# Altium PCB PowerTree.PcbDoc
Units mil, origin at the board's own origin, x right, y up, seen from the top; angles counter-clockwise.
Board outline 7270 x 2880 mil, 2 copper layers (Top Layer, Bottom Layer); 214 components, 114 nets, 516 pads, 130 vias.
Unrouted connection lines stored in the file: 3.
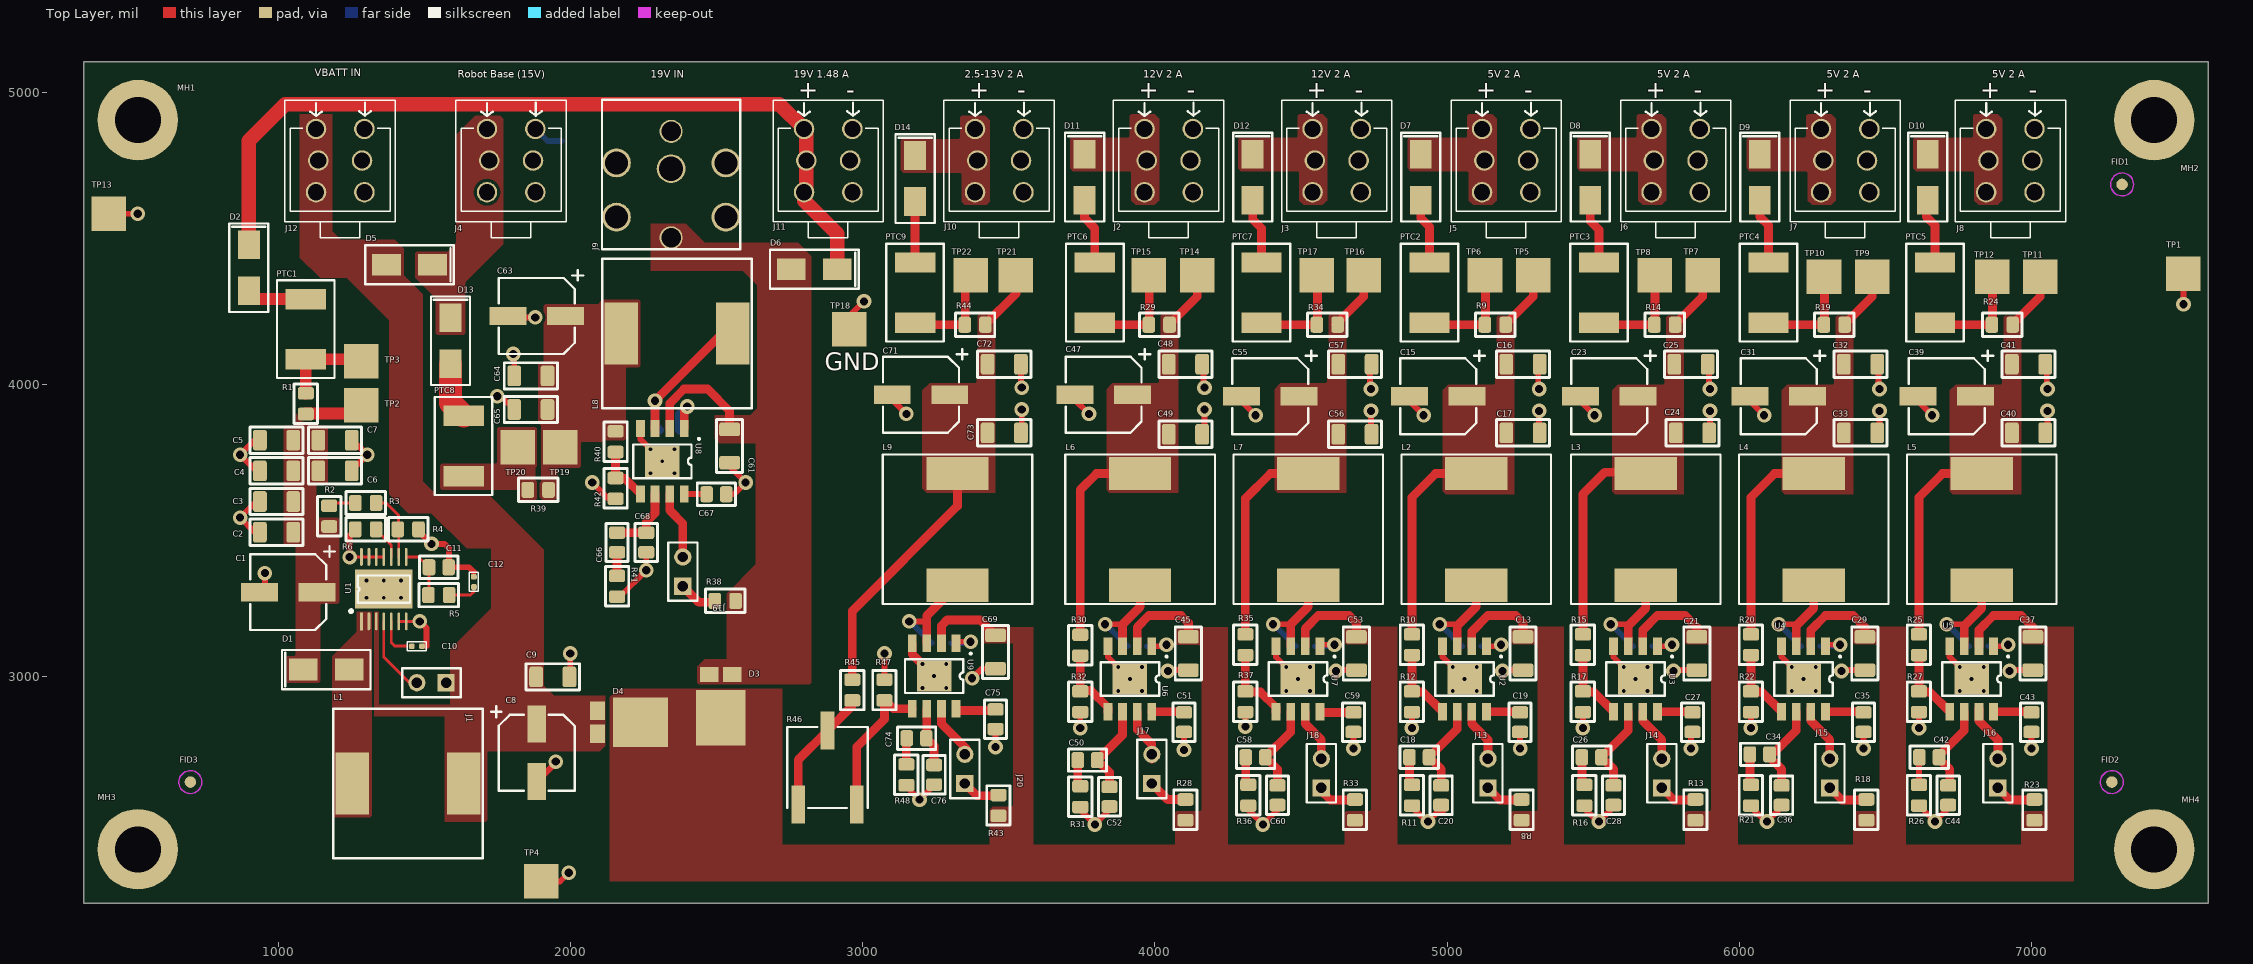
[diagram p0: Top Layer view]
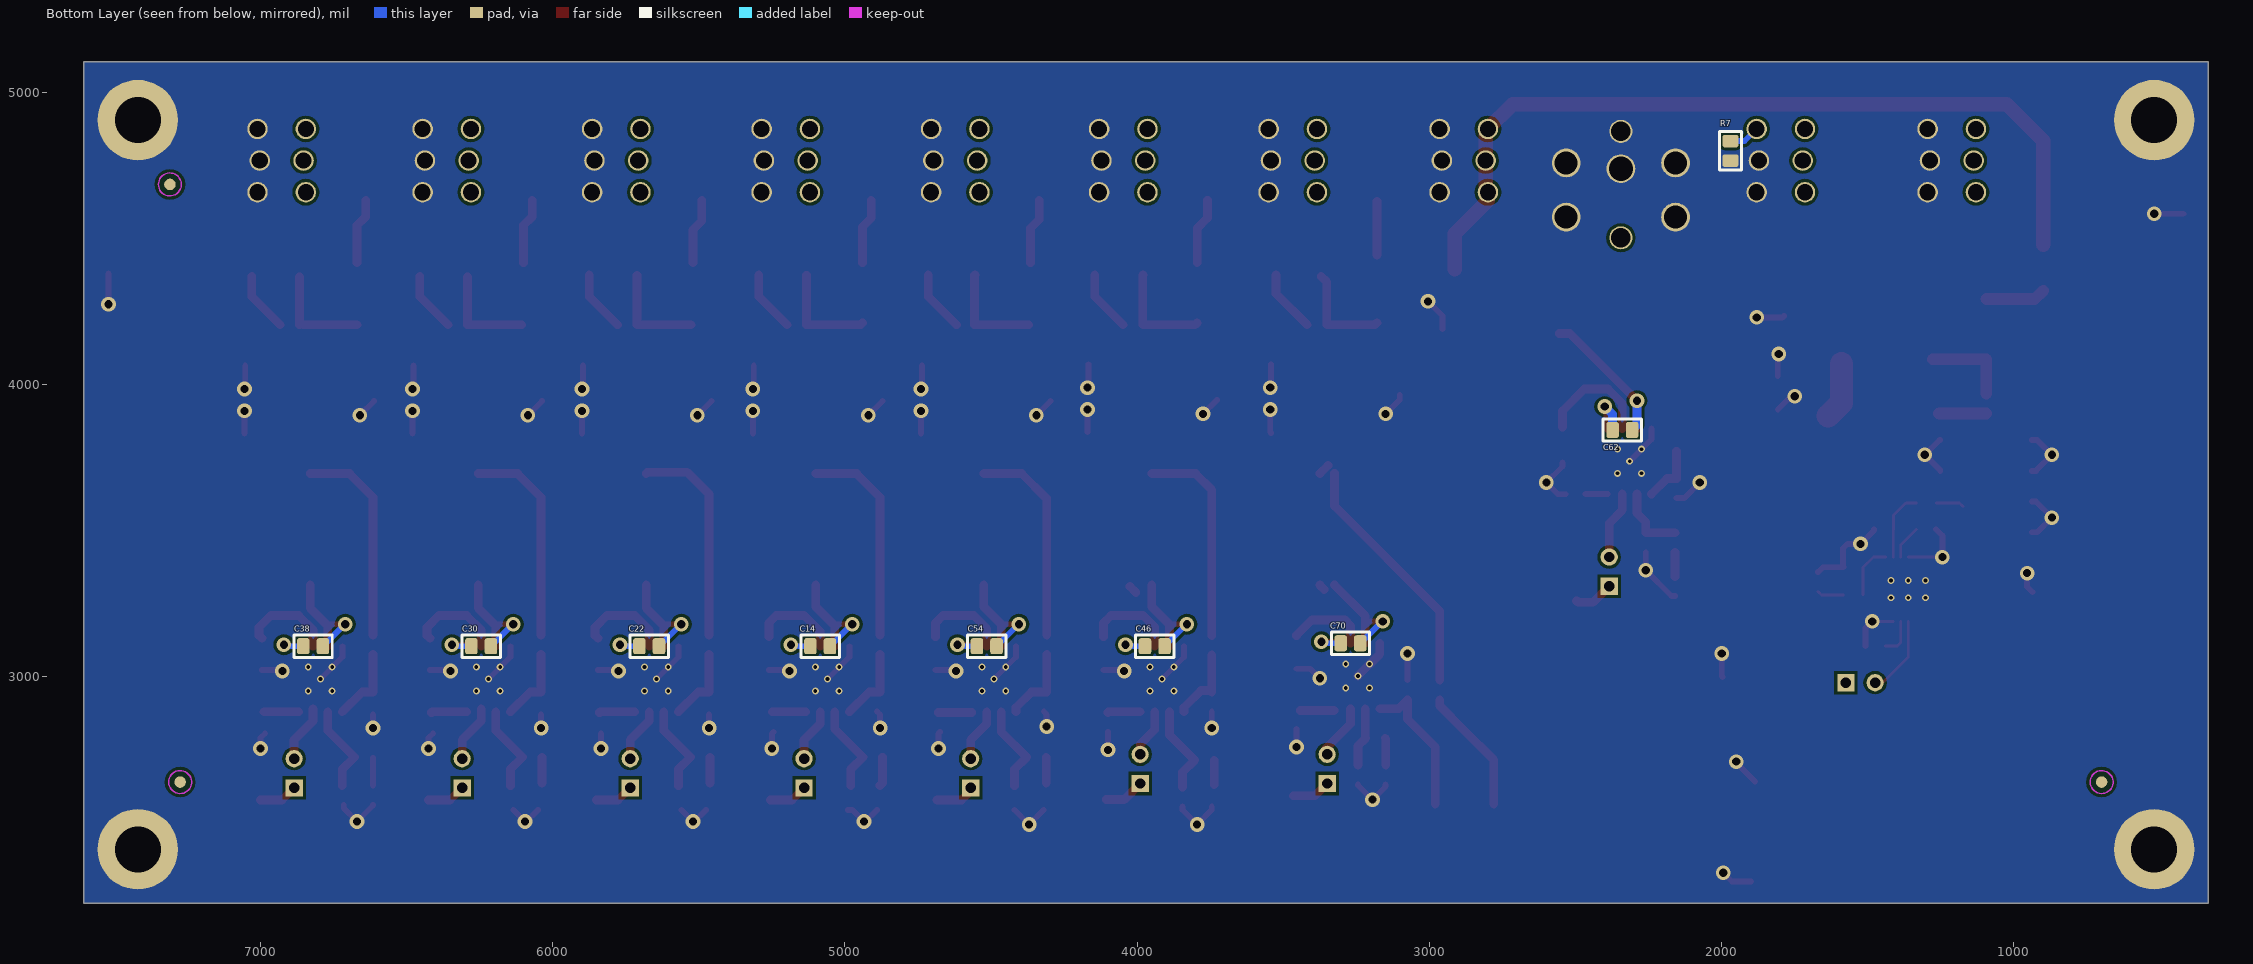
[diagram p1: Bottom Layer view, seen from below]
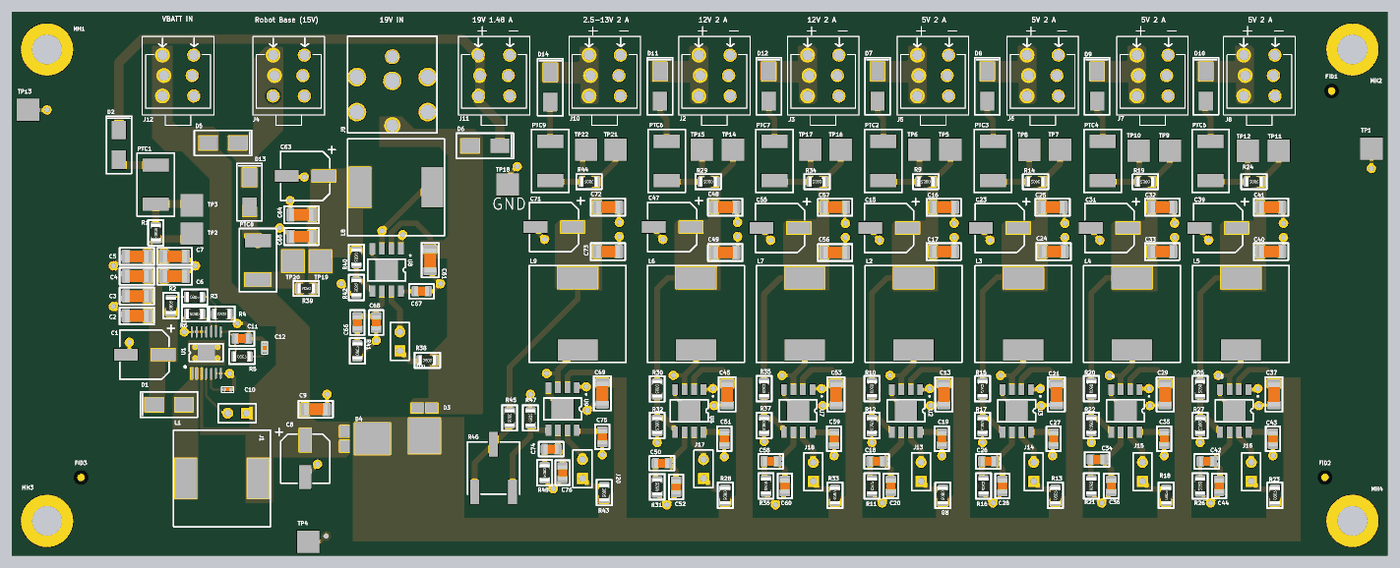
[diagram p2: 3D render of the assembled board from above, using the file's embedded part models]
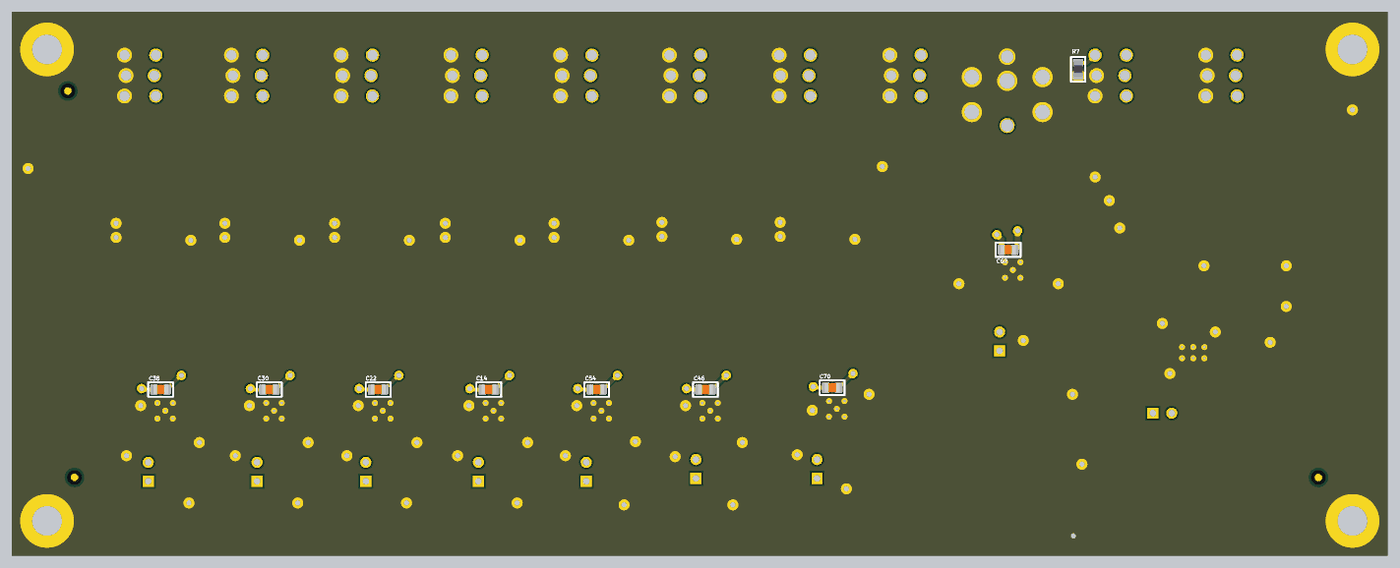
[diagram p3: 3D render of the assembled board from below, using the file's embedded part models]

## Layer stack, top to bottom
Top Solder: solder mask 0.4, Solder Resist, Dk 3.5
Top Layer: signal copper 1.4
Dielectric 1: dielectric 12.6, FR-4, Dk 4.8
Bottom Layer: signal copper 1.4
Bottom Solder: solder mask 0.4, Solder Resist, Dk 3.5

## Board outline
335,2225 335,5105 7605,5105 7605,2225

## Design rules (kind name [scope] priority, off if disabled: settings)
Clearance [All] p1: gap=10
PlaneConnect [All] p1: planeconnectstyle=Direct reliefexpansion=20 reliefentries=4 reliefconductorwidth=10 reliefairgap=10
PolygonConnect [All] p1: connectstyle=Direct reliefconductorwidth=30 reliefentries=4 polygonreliefangle="90 Angle" airgapwidth=10
RoutingVias [All] p1: holewidth=28 width=50 viastyle="Through Hole" minholewidth=28 minwidth=50 maxholewidth=28 maxwidth=50
SolderMaskExpansion [All] p1: expansion=4
Width [All] p1: maxlimit=100 minlimit=10 preferedwidth=10 minimp=50.000000 maximp=50.000000 favimp=50.000000
29 further rules are at their usual default settings.

## Classes and differential pairs
component class "Buck Boost 19V": C1 C2 C3 C4 C5 C6 C7 C8 C9 C10 C11 C12 D1 D2 J1 L1 PTC1 R1 R2 R3 R4 R5 R6 TP1 TP2 TP3 U1
component class Connectors: D3 D4 D5 D6 J2 J3 J4 J5 J6 J7 J8 J9 J10 J11 J12 R7
component class DC_DC_5V_1: C13 C14 C15 C16 C17 C18 C19 C20 C21 C22 C23 C24 C25 C26 C27 C28 D7 D8 J13 J14 L2 L3 PTC2 PTC3 R8 R9 R10 R11 R12 R13 R14 R15 R16 R17 TP4 TP5 TP6 TP7 TP8 U2 U3
component class DC_DC_5V_2: C29 C30 C31 C32 C33 C34 C35 C36 C37 C38 C39 C40 C41 C42 C43 C44 D9 D10 J15 J16 L4 L5 PTC4 PTC5 R18 R19 R20 R21 R22 R23 R24 R25 R26 R27 TP9 TP10 TP11 TP12 U4 U5
component class DC_DC_12V: C45 C46 C47 C48 C49 C50 C51 C52 C53 C54 C55 C56 C57 C58 C59 C60 D11 D12 J17 J18 L6 L7 PTC6 PTC7 R28 R29 R30 R31 R32 R33 R34 R35 R36 R37 TP13 TP14 TP15 TP16 TP17 U6 U7
component class DC_DC_15V_AND_VAR: C61 C62 C63 C64 C65 C66 C67 C68 C69 C70 C71 C72 C73 C74 C75 C76 D13 D14 J19 J20 L8 L9 PTC8 PTC9 R38 R39 R40 R41 R42 R43 R44 R45 R46 R47 R48 TP18 TP19 TP20 TP21 TP22 U8 U9
component class Title: FID1 FID2 FID3 MH1 MH2 MH3 MH4

## Components (designator, comment, footprint, x,y, rotation, side; value= is the part's Value field where it differs from the comment)
C1 "CAP_EEE-FK1V330P" "CAP ALU - 6.3MM DIA" 1035,3290 r0 top
C2 "CAP_GRT31CR61H106ME01L‎" CAP_1206 995,3495 r180 top
C3 "CAP_GRT31CR61H106ME01L‎" CAP_1206 995,3600 r180 top
C4 "CAP_GRT31CR61H106ME01L‎" CAP_1206 995,3705 r180 top
C5 "CAP_GRT31CR61H106ME01L‎" CAP_1206 995,3810 r180 top
C6 "CAP_GRT31CR61H106ME01L‎" CAP_1206 1195,3705 r0 top
C7 "CAP_GRT31CR61H106ME01L‎" CAP_1206 1195,3810 r0 top
C8 "CAP_EEE-FK1V330P" "CAP ALU - 6.3MM DIA" 1885,2740 r90 top
C9 "CAP_GRT31CR61H106ME01L‎" CAP_1206 1940,3000 r0 top
C10 "CAP_‎‎‎C0402C473K3RACAUTO‎" CAP_0402 1475,3105 r0 top
C11 "CAP_‎‎‎C0805C430J5GAC7800" CAP_0805 1550,3375 r0 top
C12 "CAP_‎‎‎C0402C473K3RACAUTO‎" CAP_0402 1670,3325 r90 top
C13 "CAP_‎CL31A106KAHNFNE‎" CAP_1206 5260,3080 r270 top
C14 "CAP_‎‎‎‎CL21B103KBANNNC" CAP_0805 5085,3105 r180 bottom
C15 "CAP_EEE-FK1V330P" "CAP ALU - 6.3MM DIA" 4970,3960 r0 top
C16 "CAP_‎‎CL31A226KAHNNNE‎" CAP_1206 5260,4070 r0 top
C17 "CAP_‎‎CL31A226KAHNNNE‎" CAP_1206 5260,3835 r0 top
C18 "CAP_CL21B332KBANNNC‎" CAP_0805 4905,2725 r180 top
C19 "CAP_CC0805KRX7R9BB104‎" CAP_0805 5250,2845 r270 top
C20 "CAP_‎‎‎‎CL21B103KBANNNC" CAP_0805 4980,2595 r270 top
C21 "CAP_‎CL31A106KAHNFNE‎" CAP_1206 5855,3080 r270 top
C22 "CAP_‎‎‎‎CL21B103KBANNNC" CAP_0805 5670,3105 r180 bottom
C23 "CAP_EEE-FK1V330P" "CAP ALU - 6.3MM DIA" 5555,3960 r0 top
C24 "CAP_‎‎CL31A226KAHNNNE‎" CAP_1206 5840,3835 r0 top
C25 "CAP_‎‎CL31A226KAHNNNE‎" CAP_1206 5835,4070 r0 top
C26 "CAP_CL21B332KBANNNC‎" CAP_0805 5495,2725 r180 top
C27 "CAP_CC0805KRX7R9BB104‎" CAP_0805 5840,2845 r270 top
C28 "CAP_‎‎‎‎CL21B103KBANNNC" CAP_0805 5570,2595 r270 top
C29 "CAP_‎CL31A106KAHNFNE‎" CAP_1206 6430,3080 r270 top
C30 "CAP_‎‎‎‎CL21B103KBANNNC" CAP_0805 6245,3105 r180 bottom
C31 "CAP_EEE-FK1V330P" "CAP ALU - 6.3MM DIA" 6135,3960 r0 top
C32 "CAP_‎‎CL31A226KAHNNNE‎" CAP_1206 6415,4070 r0 top
C33 "CAP_‎‎CL31A226KAHNNNE‎" CAP_1206 6415,3835 r0 top
C34 "CAP_CL21B332KBANNNC‎" CAP_0805 6070,2735 r180 top
C35 "CAP_CC0805KRX7R9BB104‎" CAP_0805 6425,2845 r270 top
C36 "CAP_‎‎‎‎CL21B103KBANNNC" CAP_0805 6145,2595 r270 top
C37 "CAP_‎CL31A106KAHNFNE‎" CAP_1206 7005,3080 r270 top
C38 "CAP_‎‎‎‎CL21B103KBANNNC" CAP_0805 6820,3105 r180 bottom
C39 "CAP_EEE-FK1V330P" "CAP ALU - 6.3MM DIA" 6710,3960 r0 top
C40 "CAP_‎‎CL31A226KAHNNNE‎" CAP_1206 6990,3835 r0 top
C41 "CAP_‎‎CL31A226KAHNNNE‎" CAP_1206 6990,4070 r0 top
C42 "CAP_CL21B332KBANNNC‎" CAP_0805 6650,2725 r180 top
C43 "CAP_CC0805KRX7R9BB104‎" CAP_0805 7000,2845 r270 top
C44 "CAP_‎‎‎‎CL21B103KBANNNC" CAP_0805 6715,2595 r270 top
C45 "CAP_‎CL31A106KAHNFNE‎" CAP_1206 4115,3080 r270 top
C46 "CAP_‎‎‎‎CL21B103KBANNNC" CAP_0805 3940,3105 r180 bottom
C47 "CAP_EEE-FK1V330P" "CAP ALU - 6.3MM DIA" 3825,3965 r0 top
C48 "CAP_‎‎CL31A226KAHNNNE‎" CAP_1206 4105,4070 r0 top
C49 "CAP_‎‎CL31A226KAHNNNE‎" CAP_1206 4105,3830 r0 top
C50 "CAP_CL21B332KBANNNC‎" CAP_0805 3770,2715 r180 top
C51 "CAP_CC0805KRX7R9BB104‎" CAP_0805 4100,2845 r270 top
C52 "CAP_‎‎‎‎CL21B103KBANNNC" CAP_0805 3845,2590 r270 top
C53 "CAP_‎CL31A106KAHNFNE‎" CAP_1206 4690,3080 r270 top
C54 "CAP_‎‎‎‎CL21B103KBANNNC" CAP_0805 4515,3105 r180 bottom
C55 "CAP_EEE-FK1V330P" "CAP ALU - 6.3MM DIA" 4395,3960 r0 top
C56 "CAP_‎‎CL31A226KAHNNNE‎" CAP_1206 4685,3830 r0 top
C57 "CAP_‎‎CL31A226KAHNNNE‎" CAP_1206 4685,4070 r0 top
C58 "CAP_CL21B332KBANNNC‎" CAP_0805 4345,2725 r180 top
C59 "CAP_CC0805KRX7R9BB104‎" CAP_0805 4680,2845 r270 top
C60 "CAP_‎‎‎‎CL21B103KBANNNC" CAP_0805 4420,2595 r270 top
C61 "CAP_‎CL31A106KAHNFNE‎" CAP_1206 2545,3790 r270 top
C62 "CAP_‎‎‎‎CL21B103KBANNNC" CAP_0805 2340,3845 r180 bottom
C63 "CAP_EEE-FK1V330P" "CAP ALU - 6.3MM DIA" 1885,4235 r0 top
C64 "CAP_‎‎CL31A226KAHNNNE‎" CAP_1206 1865,4030 r180 top
C65 "CAP_‎‎CL31A226KAHNNNE‎" CAP_1206 1865,3915 r180 top
C66 "CAP_CL21B332KBANNNC‎" CAP_0805 2160,3460 r270 top
C67 "CAP_CC0805KRX7R9BB104‎" CAP_0805 2500,3625 r0 top
C68 "CAP_‎‎‎‎CL21B103KBANNNC" CAP_0805 2260,3460 r270 top
C69 "CAP_GRT31CR61H106ME01L‎" CAP_1206 3455,3085 r270 top
C70 "CAP_‎‎‎‎CL21B103KBANNNC" CAP_0805 3270,3115 r180 bottom
C71 "CAP_EEE-FK1V330P" "CAP ALU - 6.3mm DIA" 3200,3965 r0 top
C72 "CAP_‎‎CL31A226KAHNNNE‎" CAP_1206 3485,4070 r0 top
C73 "CAP_‎‎CL31A226KAHNNNE‎" CAP_1206 3485,3835 r0 top
C74 "CAP_CL21B332KBANNNC‎" CAP_0805 3185,2790 r180 top
C75 "CAP_CC0805KRX7R9BB104‎" CAP_0805 3455,2855 r270 top
C76 "CAP_‎‎‎‎CL21B103KBANNNC" CAP_0805 3245,2665 r270 top
D1 "DIODE_SCH_PMEG6045ETPX" DO-214AC_SOD128 1165,3025 r0 top
D2 "DIODE_SCH_PMEG6045ETPX" DO-214AC_SOD128 900,4400 r270 top
D3 "DIODE_SCH_FSV15100V" TO277-3 2515,2860 r90 top
D4 "DIODE_SCH_FSV15100V" TO277-3 2240,2845 r180 top
D5 "DIODE_SCH_PMEG6045ETPX" DO-214AC_SOD128 1450,4410 r180 top
D6 "DIODE_SCH_PMEG6045ETPX" DO-214AC_SOD128 2835,4395 r180 top
D7 "DIODE_SCH_PMEG6045ETPX" DO-214AC_SOD128 4910,4710 r270 top
D8 "DIODE_SCH_PMEG6045ETPX" DO-214AC_SOD128 5490,4710 r270 top
D9 "DIODE_SCH_PMEG6045ETPX" DO-214AC_SOD128 6070,4710 r270 top
D10 "DIODE_SCH_PMEG6045ETPX" DO-214AC_SOD128 6645,4710 r270 top
D11 "DIODE_SCH_PMEG6045ETPX" DO-214AC_SOD128 3760,4710 r270 top
D12 "DIODE_SCH_PMEG6045ETPX" DO-214AC_SOD128 4335,4710 r270 top
D13 "DIODE_SCH_PMEG6045ETPX" DO-214AC_SOD128 1590,4150 r270 top
D14 "SCHOTTKEY" DO-214AC_SOD128 3180,4705 r270 top
FID1 "Fiducial 1mm" FID_1MM 7310,4685 r90 top
FID2 "Fiducial 1mm" FID_1MM 7275,2640 r90 top
FID3 "Fiducial 1mm" FID_1MM 700,2640 r90 top
J1 "Header 2 pin SM" HDR1X2 1575,2980 r180 top
J2 "MOLEX 4 POS - TERMINAL BLOCK 2 POS" MOLEX4POS_TERMBLOCK2POS 3965,4875 r0 top
J3 "MOLEX 4 POS - TERMINAL BLOCK 2 POS" MOLEX4POS_TERMBLOCK2POS 4540,4875 r0 top
J4 "MOLEX 4 POS - TERMINAL BLOCK 2 POS" MOLEX4POS_TERMBLOCK2POS 1715,4875 r0 top
J5 "MOLEX 4 POS - TERMINAL BLOCK 2 POS" MOLEX4POS_TERMBLOCK2POS 5120,4875 r0 top
J6 "MOLEX 4 POS - TERMINAL BLOCK 2 POS" MOLEX4POS_TERMBLOCK2POS 5700,4875 r0 top
J7 "MOLEX 4 POS - TERMINAL BLOCK 2 POS" MOLEX4POS_TERMBLOCK2POS 6280,4875 r0 top
J8 "MOLEX 4 POS - TERMINAL BLOCK 2 POS" MOLEX4POS_TERMBLOCK2POS 6845,4875 r0 top
J9 "Barrel 5.5x2.5mm" "BARREL 5.5MM 2.5MM" 2345,4975 r270 top
J10 "MOLEX 4 POS - TERMINAL BLOCK 2 POS" MOLEX4POS_TERMBLOCK2POS 3385,4875 r0 top
J11 "MOLEX 4 POS - TERMINAL BLOCK 2 POS" MOLEX4POS_TERMBLOCK2POS 2800,4875 r0 top
J12 "MOLEX 4 POS - TERMINAL BLOCK 2 POS" MOLEX4POS_TERMBLOCK2POS 1130,4875 r0 top
J13 "Header 2 pin SM" HDR1X2 5140,2620 r90 top
J14 "Header 2 pin SM" HDR1X2 5735,2620 r90 top
J15 "Header 2 pin SM" HDR1X2 6310,2620 r90 top
J16 "Header 2 pin SM" HDR1X2 6885,2620 r90 top
J17 "Header 2 pin SM" HDR1X2 3990,2635 r90 top
J18 "Header 2 pin SM" HDR1X2 4570,2620 r90 top
J19 "Header 2 pin SM" HDR1X2 2385,3310 r90 top
J20 "Header 2 pin SM" HDR1X2 3350,2635 r90 top
L1 "IND_SRR1280-121K" "BOURNS 12.5X12.5MM" 1445,2635 r180 top
L2 "IND_SRR1280-101M" "BOURNS 12.5X12.5MM" 5100,3505 r90 top
L3 "IND_SRR1280-101M" "BOURNS 12.5X12.5MM" 5680,3505 r90 top
L4 "IND_SRR1280-101M" "BOURNS 12.5X12.5MM" 6255,3505 r90 top
L5 "IND_SRR1280-101M" "BOURNS 12.5X12.5MM" 6830,3505 r90 top
L6 "IND_SRR1280-101M" "BOURNS 12.5X12.5MM" 3950,3505 r90 top
L7 "IND_SRR1280-101M" "BOURNS 12.5X12.5MM" 4525,3505 r90 top
L8 "IND_SRR1280-101M" "BOURNS 12.5X12.5MM" 2365,4175 r180 top
L9 "IND_SRR1280-101M" "BOURNS 12.5X12.5MM" 3325,3505 r90 top
MH1 "Mounting Hole 6/32" MH_ENG_6-32 520,4905 r0 top
MH2 "Mounting Hole 6/32" MH_ENG_6-32 7420,4905 r0 top
MH3 "Mounting Hole 6/32" MH_ENG_6-32 520,2410 r0 top
MH4 "Mounting Hole 6/32" MH_ENG_6-32 7420,2410 r0 top
PTC1 "PTC_0ZCG0160BF2C" "PTC - 1812" 1095,4190 r90 top
PTC2 "PTC_0ZCG0160BF2C" "PTC - 1812" 4940,4315 r90 top
PTC3 "PTC_0ZCG0160BF2C" "PTC - 1812" 5520,4315 r90 top
PTC4 "PTC_0ZCG0160BF2C" "PTC - 1812" 6100,4315 r90 top
PTC5 "PTC_0ZCG0160BF2C" "PTC - 1812" 6670,4315 r90 top
PTC6 "PTC_0ZCG0160BF2C" "PTC - 1812" 3795,4315 r90 top
PTC7 "PTC_0ZCG0160BF2C" "PTC - 1812" 4365,4315 r90 top
PTC8 "PTC_0ZCG0160BF2C" "PTC - 1812" 1635,3790 r90 top
PTC9 "PTC_0ZCG0160BF2C" "PTC - 1812" 3180,4315 r90 top
R1 "RES_‎‎‎‎‎ KRL1220E-M-R010-F-T5" RES_0805 1095,3935 r90 top
R2 "RES_‎ERJ-6ENF2152V" RES_0805 1175,3550 r90 top
R3 "RES_‎‎CRCW0805200RFKEA‎" RES_0805 1300,3595 r0 top
R4 "RES_‎‎‎‎CRCW08051K50FKEAC" RES_0805 1445,3505 r0 top
R5 "RES_‎‎‎‎CRCW08051K50FKEAC" RES_0805 1550,3280 r0 top
R6 "RES_‎‎‎CRCW0805118KFKEA" RES_0805 1300,3505 r180 top
R7 "RES - 0805" FER_0805 1970,4800 r270 bottom
R8 "RES_‎RMCF0805FT100K‎" RES_0805 5255,2545 r270 top
R9 "RES_‎‎‎‎‎ KRL1220E-M-R010-F-T5" RES_0805 5165,4205 r180 top
R10 "RES_‎‎RMCF0805FT47K5‎" RES_0805 4880,3110 r270 top
R11 "RES_‎ RC0805FR-0713KL" RES_0805 4880,2595 r90 top
R12 "RES_‎RMCF0805FT10K0" RES_0805 4880,2915 r270 top
R13 "RES_‎RMCF0805FT100K‎" RES_0805 5850,2545 r90 top
R14 "RES_‎‎‎‎‎ KRL1220E-M-R010-F-T5" RES_0805 5745,4205 r180 top
R15 "RES_‎‎RMCF0805FT47K5‎" RES_0805 5465,3110 r270 top
R16 "RES_‎ RC0805FR-0713KL" RES_0805 5470,2595 r270 top
R17 "RES_‎RMCF0805FT10K0" RES_0805 5465,2915 r270 top
R18 "RES_‎RMCF0805FT100K‎" RES_0805 6435,2545 r90 top
R19 "RES_‎‎‎‎‎ KRL1220E-M-R010-F-T5" RES_0805 6325,4205 r180 top
R20 "RES_‎‎RMCF0805FT47K5‎" RES_0805 6040,3110 r270 top
R21 "RES_‎ RC0805FR-0713KL" RES_0805 6040,2595 r270 top
R22 "RES_‎RMCF0805FT10K0" RES_0805 6040,2915 r270 top
R23 "RES_‎RMCF0805FT100K‎" RES_0805 7010,2545 r90 top
R24 "RES_‎‎‎‎‎ KRL1220E-M-R010-F-T5" RES_0805 6900,4205 r180 top
R25 "RES_‎‎RMCF0805FT47K5‎" RES_0805 6615,3110 r270 top
R26 "RES_‎ RC0805FR-0713KL" RES_0805 6615,2595 r270 top
R27 "RES_‎RMCF0805FT10K0" RES_0805 6615,2915 r270 top
R28 "RES_‎RMCF0805FT100K‎" RES_0805 4105,2545 r270 top
R29 "RES_‎‎‎‎‎ KRL1220E-M-R010-F-T5" RES_0805 4015,4205 r180 top
R30 "RES_‎RMCF0805FT124K" RES_0805 3745,3108.5 r270 top
R31 "RES_‎ RC0805FR-0713KL" RES_0805 3745,2590 r90 top
R32 "RES_‎RMCF0805FT10K0" RES_0805 3745,2915 r270 top
R33 "RES_‎RMCF0805FT100K‎" RES_0805 4685,2545 r270 top
R34 "RES_‎‎‎‎‎ KRL1220E-M-R010-F-T5" RES_0805 4590,4205 r180 top
R35 "RES_‎RMCF0805FT124K" RES_0805 4310,3110 r270 top
R36 "RES_‎ RC0805FR-0713KL" RES_0805 4320,2595 r90 top
R37 "RES_‎RMCF0805FT10K0" RES_0805 4310,2915 r270 top
R38 "RES_‎RMCF0805FT100K‎" RES_0805 2530,3260 r0 top
R39 "RES_‎‎‎‎‎ KRL1220E-M-R010-F-T5" RES_0805 1890,3640 r180 top
R40 "RES_‎‎RC0805FR-07154KL" RES_0805 2155,3805 r270 top
R41 "RES_‎ RC0805FR-0713KL" RES_0805 2160,3310 r90 top
R42 "RES_‎RMCF0805FT10K0" RES_0805 2155,3645 r270 top
R43 "RES_‎RMCF0805FT100K‎" RES_0805 3465,2560 r270 top
R44 "RES_‎‎‎‎‎ KRL1220E-M-R010-F-T5" RES_0805 3385,4205 r180 top
R45 "RES_‎‎‎‎CRCW08051K50FKEAC" RES_0805 2965,2955 r270 top
R46 "POT_3361P-1-103GLF" 3361P 2880,2690 r0 top
R47 "RES_‎‎‎RC0805FR-07866RL" RES_0805 3075,2955 r90 top
R48 "RES_‎ RC0805FR-0713KL" RES_0805 3150,2665 r270 top
TP1 "TestPoint 3x3mm" "TESTPOINT 3X3MM" 7520,4380 r0 top
TP2 "TestPoint 3x3mm" "TESTPOINT 3X3MM" 1285,3930 r0 top
TP3 "TestPoint 3x3mm" "TESTPOINT 3X3MM" 1285,4080 r0 top
TP4 "TestPoint 3x3mm" "TESTPOINT 3X3MM" 1900,2300 r0 top
TP5 "TestPoint 3x3mm" "TESTPOINT 3X3MM" 5295,4375 r0 top
TP6 "TestPoint 3x3mm" "TESTPOINT 3X3MM" 5130,4375 r0 top
TP7 "TestPoint 3x3mm" "TESTPOINT 3X3MM" 5875,4375 r0 top
TP8 "TestPoint 3x3mm" "TESTPOINT 3X3MM" 5711.5,4373.5 r0 top
TP9 "TestPoint 3x3mm" "TESTPOINT 3X3MM" 6455,4370 r0 top
TP10 "TestPoint 3x3mm" "TESTPOINT 3X3MM" 6290,4370 r90 top
TP11 "TestPoint 3x3mm" "TESTPOINT 3X3MM" 7030,4370 r0 top
TP12 "TestPoint 3x3mm" "TESTPOINT 3X3MM" 6866.5,4368.5 r90 top
TP13 "TestPoint 3x3mm" "TESTPOINT 3X3MM" 420,4585 r90 top
TP14 "TestPoint 3x3mm" "TESTPOINT 3X3MM" 4145,4375 r90 top
TP15 "TestPoint 3x3mm" "TESTPOINT 3X3MM" 3980,4375 r90 top
TP16 "TestPoint 3x3mm" "TESTPOINT 3X3MM" 4715,4375 r90 top
TP17 "TestPoint 3x3mm" "TESTPOINT 3X3MM" 4555,4375 r90 top
TP18 "TestPoint 3x3mm" "TESTPOINT 3X3MM" 2955,4190 r90 top
TP19 "TestPoint 3x3mm" "TESTPOINT 3X3MM" 1965,3785 r90 top
TP20 "TestPoint 3x3mm" "TESTPOINT 3X3MM" 1820,3785 r90 top
TP21 "TestPoint 3x3mm" "TESTPOINT 3X3MM" 3525,4375 r0 top
TP22 "TestPoint 3x3mm" "TESTPOINT 3X3MM" 3370,4375 r90 top
U1 "REG_BOOST_PS55340" 14-TSSOP 1285,3190 r90 top
U2 "REG_SW_RT8284N" SOP8 5135,3105 r270 top
U3 "REG_SW_RT8284N" SOP8 5720,3105 r270 top
U4 "REG_SW_RT8284N" SOP8 6295,3105 r270 top
U5 "REG_SW_RT8284N" SOP8 6870,3105 r270 top
U6 "REG_SW_RT8284N" SOP8 3990,3105 r270 top
U7 "REG_SW_RT8284N" SOP8 4565,3105 r270 top
U8 "REG_SW_RT8284N" SOP8 2390,3850 r270 top
U9 "REG_SW_RT8284N" SOP8 3320,3115 r270 top

## Footprints (in the part's own frame and the unit in brackets; to place one, negate y for a bottom-side part, rotate by r counter-clockwise, add the part's x,y. Pads: shape width x height; smd on the part's side, far side on the other; paste and mask are expansions set on the pad)
14-TSSOP [mm]
  rect 1.55x0.25 smd: 1(0,0)
  oval 1.55x0.25 smd: 2(0,-0.65) 3(0,-1.3) 4(0,-1.95) 5(0,-2.6) 6(0,-3.25) 7(0,-3.9) 8(5.6,-3.9) 9(5.6,-3.25) 10(5.6,-2.6) 11(5.6,-1.95) 12(5.6,-1.3) 13(5.6,-0.65) 14(5.6,0)
  rect 3.4x5 smd paste-5 mask-5: 15(2.8,-1.95)
  silkscreen extent 0.76,-4.23 3.99,1.02
3361P [mm] "3361P potentiometer series"
  rect 1.19x3.3 smd: 1(-2.54,-3.2) 2(2.54,-3.2) 3(0,3.2)
  silkscreen extent -3.5,-3.52 3.5,3.52
"BARREL 5.5MM 2.5MM" [mm]
  round 2 hole 1.7: 1(12,0) 3(2.75,0)
  round 2.5 hole 2.1: 2(6,0)
  round 2.5 hole 2: 3(5.5,4.75) 3(5.5,-4.75) 3(10.2,4.75) 3(10.2,-4.75)
  silkscreen extent 0,-6 13,6
"BOURNS 12.5X12.5MM" [mm]
  rect 2.9x5.4 smd: 1(-4.85,0) 2(4.85,0)
  silkscreen extent -6.5,-6.5 6.5,6.5
"CAP ALU - 6.3MM DIA" [mm]
  rect 3.2x1.6 smd: 1(2.5,0) 2(-2.5,0)
  silkscreen extent -3.3,-3.3 4.05,3.98
"CAP ALU - 6.3mm DIA" [mm]
  rect 3.2x1.6 smd: 1(2.5,0) 2(-2.5,0)
  silkscreen extent -3.3,-3.3 4.05,3.98
CAP_0402 [mil]
  rrect60% 20x20 smd: 1(-17.5,0) 2(17.5,0)
  silkscreen extent -32,-15 32,15, body extent -19,-10 20,10, height 20
CAP_0805 [mil]
  rrect37% 43x55 smd: 1(-33.5,0) 2(33.5,0)
  silkscreen extent -66,-38 66,38, body extent -39,-24 40,25, height 49
CAP_1206 [mil]
  rrect34% 47x71 smd: 1(-57,0) 2(57,0)
  silkscreen extent -91,-45 91,45, body extent -62,-31 64,32, height 49
DO-214AC_SOD128 [mm] "In between DO-214AC and SOD128 diode package for easy diode change"
  rect 2.5x1.9 smd: 1(2,0) 2(-2,0)
  silkscreen extent -3.85,-1.7 3.85,1.7
FER_0805 [mil]
  rrect37% 43x55 smd: 1(-33.5,0) 2(33.5,0)
  silkscreen extent -66,-38 66,38, body extent -40,-25 38,25, height 33
FID_1MM [mm] "Fiducial 1mm diameter - Exposed 2mm"
  round 1 all layers, no hole paste-1 mask+0.5: 0(0,0)
  Keep-Out Layer circle w0.127: c0,0 r1
HDR1X2 [mm] "Connector; Header; 2 Position"
  rect 1.5x1.5 hole 0.9: 1(0,0)
  round 1.5 hole 0.9: 2(2.54,0)
  silkscreen extent -1.27,-1.27 3.81,1.27
MH_ENG_6-32 [mm] "Mounting hole - Imperial 6-32"
  round 7 hole 4: 1(0,0)
MOLEX4POS_TERMBLOCK2POS [mm]
  round 1.78 hole 1.4: 1(0,0) 2(4.2,0) 3(0,-5.5) 4(4.2,-5.5) 5(0.195,-2.75) 6(4,-2.75)
  silkscreen extent -2.7,-9.45 6.9,2.5
"PTC - 1812" [mm]
  rect 1.78x3.5 smd: 1(-2.615,0) 2(2.615,0)
  silkscreen extent -4.25,-2.5 4.26,2.5
RES_0805 [mil]
  rrect37% 43x55 smd: 1(-35.5,0) 2(35.5,0)
  silkscreen extent -68,-40 68,40, body extent -45,-27 45,27, height 30
SOP8 [mm]
  rect 1.5x0.76 smd: 1(0,0) 2(0,-1.27) 3(0,-2.54) 4(0,-3.81) 5(5.7,-3.81) 6(5.7,-2.54) 7(5.7,-1.27) 8(5.7,0)
  rect 2.7x3 smd: 9(2.85,-1.905)
  silkscreen extent 0.85,-4.44 4.32,1.33
"TESTPOINT 3X3MM" [mm]
  rect 3x3 smd: 1(0,0)
TO277-3 [mm]
  rect 1.3x1.6 smd: 1(3.75,-1) 1(3.75,1)
  rect 4.8x4.3 smd: 2(0,0)

## Part data
C1 C8 C15 C23 C31 C39 C47 C55 C63 C71: "CAP ALU 33µF 35V"
C2 C3 C4 C5 C6 C7 C9 C69: library part CAP_GRT31CR61H106ME01L?, "CAP CER 10uF 50V 1206"
C10 C12: library part CAP_???C0402C473K3RACAUTO?, "CAP CER 0.047uF 25V 0402"
C11: library part CAP_???C0805C430J5GAC7800, "CAP CER 43pF 50V 0805"
C13 C21 C29 C37 C45 C53 C61: library part CAP_?CL31A106KAHNFNE?, "CAP CER 10uF 25V 1206"
C14 C20 C22 C28 C30 C36 C38 C44 C46 C52 C54 C60 C62 C68 C70 C76: library part CAP_????CL21B103KBANNNC, "CAP CER 10000pF 50V 0805"
C16 C17 C24 C25 C32 C33 C40 C41 C48 C49 C56 C57 C64 C65 C72 C73: library part CAP_??CL31A226KAHNNNE?, "CAP CER 22uF 25V 1206"
C18 C26 C34 C42 C50 C58 C66 C74: library part CAP_CL21B332KBANNNC?, "CAP CER 3300pF 50V 0805"
C19 C27 C35 C43 C51 C59 C67 C75: library part CAP_CC0805KRX7R9BB104?, "CAP CER 0.1uF 50V 0805"
D1 D2 D3 D4 D5 D6 D7 D8 D9 D10 D11 D12 D13: "Diode Schottky 60V 4.5A Surface Mount CFP5"
FID1 FID2 FID3: library part "FID - 1MM", "FID - 1MM"
J9: "Jack 5.5x2.5mm"
L1: "IND 120µH Shielded Wirewound Inductor 1.95A"
L2 L3 L4 L5 L6 L7 L8 L9: "IND 100µH Shielded Wirewound Inductor 2.1A"
MH1 MH2 MH3 MH4: library part "MH - 6-32"
PTC1 PTC2 PTC3 PTC4 PTC5 PTC6 PTC7 PTC8 PTC9: "PTC_Polymeric PTC Resettable Fuse 16V 1.6A Ih"
R1 R9 R14 R19 R24 R29 R34 R39 R44: library part "RES_????? KRL1220E-M-R010-F-T5", "RES 0.01R 1% 1/2W 0805"
R2: library part RES_?ERJ-6ENF2152V, "RES 21.5K 1% 1/8W 0805"
R3: library part RES_??CRCW0805200RFKEA?, "RES 200R 1% 1/8W 0805"
R4 R5 R45: library part RES_????CRCW08051K50FKEAC, "RES 1.5K 1% 1/8W 0805"
R6: library part RES_???CRCW0805118KFKEA, "RES 118R 1% 1/8W 0805"
R8 R13 R18 R23 R28 R33 R38 R43: library part RES_?RMCF0805FT100K?, "RES 100K 1% 1/8W 0805"
R10 R15 R20 R25: library part RES_??RMCF0805FT47K5?, "RES 47.5K 1% 1/8W 0805"
R11 R16 R21 R26 R31 R36 R41 R48: library part "RES_? RC0805FR-0713KL", "RES 13K 1% 1/8W 0805"
R12 R17 R22 R27 R32 R37 R42: library part RES_?RMCF0805FT10K0, "RES 10K 1% 1/8W 0805"
R30 R35: library part RES_?RMCF0805FT124K, "RES 124K 1% 1/8W 0805"
R40: library part RES_??RC0805FR-07154KL, "RES 154K 1% 1/8W 0805"
R46: "POT TRIMMER 10K OHM 0.5W GW TOP ADJ"
R47: library part RES_???RC0805FR-07866RL, "RES 866R 1% 1/8W 0805"
U2 U3 U4 U5 U6 U7 U8 U9: "REG 2A, 23V, 340kHz Synchronous Step-Down Converter"

## Via types
v1: diameter 50, hole 28, Top Layer to Bottom Layer, 84 vias
v2: diameter 23.62, hole 12.99, Top Layer to Bottom Layer, 46 vias

## Nets (pads, with @x,y where several pads share a name; then routed paths per layer and width w, separated by ;. In a path a pad name is that pad's centre, name@x,y a point inside that pad or via, vN(x,y) a via of type N, cw(c..) or ccw(c..) an arc to the next point about the centre after c; other vN are vias at no path point)
GND: C1.2 C2.2 C3.2 C4.2 C5.2 C6.2 C7.2 C8.2 C9.2 C10.2 C11.2 C12.2 C13.2 C15.2 C16.2 C17.2 C19.2 C20.2 C21.2 C23.2 C24.2 C25.2 C27.2 C28.2 C29.2 C31.2 C32.2 C33.2 C35.2 C36.2 C37.2 C39.2 C40.2 C41.2 C43.2 C44.2 C45.2 C47.2 C48.2 C49.2 C51.2 C52.2 C53.2 C55.2 C56.2 C57.2 C59.2 C60.2 C61.2 C63.2 C64.2 C65.2 C67.2 C68.2 C69.2 C71.2 C72.2 C73.2 C75.2 C76.2 J2.2 J2.4 J2.6 J3.2 J3.4 J3.6 J4.4 J4.6 J5.2 J5.4 J5.6 J6.2 J6.4 J6.6 J7.2 J7.4 J7.6 J8.2 J8.4 J8.6 J9.2 J9.3 J10.2 J10.4 J10.6 J11.2 J11.4 J11.6 J12.2 J12.4 J12.6 MH1.1 MH2.1 MH3.1 MH4.1 R4.2 R6.2 R7.2 R11.1 R12.2 R16.2 R17.2 R21.2 R22.2 R26.2 R27.2 R31.1 R32.2 R36.1 R37.2 R41.1 R42.2 R47.2 R48.2 TP1.1 TP4.1 TP13.1 TP18.1 U1.6 U1.7 U1.11 U1.12 U1.13 U1.14 U1.15 U2.4 U2.9 U3.4 U3.9 U4.4 U4.9 U5.4 U5.9 U6.4 U6.9 U7.4 U7.9 U8.4 U8.9 U9.4 U9.9 | length 7593
  Top Layer w10: v1(1245,3410) 1284.53,3410 U1.14 U1.13 U1.12 U1.11 ; U1.6 U1.7 v1(1485,3190)
  Top Layer w20: TP13.1 v1(520,4585) ; C1.2 955,3308.43 v1(955,3355) ; C2.2 920,3495 v1(870,3545) 925,3600 C3.2 ; C4.2 925,3705 v1(870,3760) 920,3810 C5.2 ; v1(1245,3410) 1245,3483.5 R6.2@1266.5,3505 ; C6.2 1252,3707 v1(1305,3760) 1255,3810 C7.2 ; R4.2@1478.5,3505 1478.5,3501.5 v1(1525,3455) 1570,3455 1585,3440 1585,3376.5 C11.2 1653.5,3375 1670,3358.5 ; v1(1485,3190) 1508.5,3166.5 1508.5,3105 ; v1(1750,3960) 1763,3960 C65.2 ; C63.2 1791.57,4230 v1(1880,4230) ; v1(1805,4105) 1808,4102 C64.2 ; C8.2 1950,2706.57 v1(1950,2710) ; TP4.1 1965,2300 v1(1995,2330) ; C9.2 2000,3003 v1(2000,3080) ; v1(2075,3665) 2128.5,3611.5 R42.2@2155,3611.5 ; R41.1@2160,3276.5 2171.5,3276.5 v1(2260,3365) C68.2 ; U8.4 2240,3812.8 v2(2315,3737.8) ; C67.2 2560,3625 v1(2600,3665) 2545,3720 C61.2 ; TP18.1 2955,4235 v1(3005,4285) ; R47.2@3075,2988.5 v1(3075,3080) ; C71.2 3101.57,3948.43 v1(3150,3900) ; R48.2@3150,2631.5 3150,2625 v1(3195,2580) 3245,2630 C76.2 ; v1(3375,2995) 3408,3028 C69.2 ; v1(3455,2760) C75.2 ; C73.2 3545,3838 v1(3545,3915) ; C72.2 3542,3993 v1(3545,3990) ; C47.2@3726.57,3948.43 v1(3775,3900) ; R31.1@3745,2556.5 3745,2545 v1(3795,2495) 3845,2545 C52.2 ; v1(3745,2825) R32.2@3745,2881.5 ; U6.4 3840,3067.8 v2(3915,2992.8) ; v1(4045,3020) 4048,3023 C45.2 ; v1(4100,2750) C51.2 ; v1@4167,3993 C48.2@4167,4070 ; C49.2@4170,3838 v1(4170,3915) ; C55.2@4296.57,3943.43 v1(4345,3895) ; v1(4310,2830) 4310,2871.5 R37.2@4320,2881.5 ; R36.1@4320,2545 v1(4370,2495) C60.2@4420,2545 ; U7.4 4415,3067.8 v2(4490,2992.8) ; v1@4623,3023 C53.2 ; C59.2@4675,2811.5 4680,2806.5 v1(4680,2755) ; v1@4737,3988 C57.2@4737,4065 ; C56.2@4740,3833 v1(4740,3910) ; C15.2@4871.57,3943.43 v1(4920,3895) ; v1(4880,2825) 4880,2871.5 R12.2@4890,2881.5 ; R11.1@4890,2545 4930,2505 v1(4935,2505) 4975,2545 C20.2@4990,2545 ; U2.4 4985,3067.8 v2(5060,2992.8) ; v1@5193,3023 C13.2 ; C19.2@5245,2811.5 5250,2806.5 v1(5250,2755) ; v1@5312,3988 C16.2@5312,4065 ; C17.2@5315,3833 v1(5315,3910) ; C23.2@5456.57,3943.43 v1(5505,3895) ; v1(5465,2825) R17.2@5465,2871.5 ; R16.2@5475,2545 v1@5515,2505 ; v1(5520,2505) C28.2@5560,2545 ; U3.4 5570,3067.8 v2(5645,2992.8) ; v1@5778,3023 C21.2@5845,3023 ; v1(5835,2755) C27.2@5835,2806.5 ; v1@5897,3988 C25.2@5897,4065 ; C24.2@5900,3833 v1(5900,3910) ; C31.2@6036.57,3943.43 v1(6085,3895) ; v1(6040,2825) R22.2@6040,2871.5 ; R21.2@6050,2545 v1@6090,2505 ; v1(6095,2505) C36.2@6135,2545 ; U4.4 6145,3067.8 v2(6220,2992.8) ; v1@6353,3023 C29.2@6420,3023 ; C35.2@6410,2806.5 6425,2791.5 v1(6425,2755) ; v1@6477,3988 C32.2@6477,4065 ; C33.2@6480,3833 v1(6480,3910) ; C39.2@6611.57,3943.43 v1(6660,3895) ; R26.2@6615,2561.5 6615,2560 v1(6670,2505) 6715,2550 C44.2 ; v1(6615,2825) R27.2@6615,2871.5 ; U5.4 6720,3067.8 v2(6795,2992.8) ; v1@6928,3023 C37.2@6995,3023 ; C43.2@6985,2806.5 7000,2791.5 v1(7000,2755) ; v1@7052,3988 C41.2@7052,4065 ; C40.2@7055,3833 v1(7055,3910) ; v1(7520,4275) TP1.1
  Top Layer w30: U9.4 3170,3077.8 v2(3245,3002.8)
  other v1: 4620,3020 5190,3020 5775,3020 6350,3020 6925,3020 4740,3985 5315,3985 5900,3985 6480,3985 7055,3985 4170,3990
  other v2: 3874.84,2951.46 3956.54,2951.46 4449.84,2951.46 4531.54,2951.46 5019.84,2951.46 5101.54,2951.46 5604.84,2951.46 5686.54,2951.46 6179.84,2951.46 6261.54,2951.46 6754.84,2951.46 6836.54,2951.46 3204.84,2961.46 3286.54,2961.46 3874.84,3034.13 3956.54,3034.13 4449.84,3034.13 4531.54,3034.13 5019.84,3034.13 5101.54,3034.13 5604.84,3034.13 5686.54,3034.13 6179.84,3034.13 6261.54,3034.13 6754.84,3034.13 6836.54,3034.13 3204.84,3044.13 3286.54,3044.13 1302.72,3270.71 1361.77,3270.71 1420.83,3270.71 1302.72,3329.76 1361.77,3329.76 1420.83,3329.76 2274.84,3696.46 2356.54,3696.46 2274.84,3779.13 2356.54,3779.13
NetC1_1: C1.1 C2.1 C3.1 C4.1 C5.1 C6.1 C7.1 D1.2 R1.1 R2.1 TP2.1 | length 161.5
  Top Layer w40: R1.1@1095,3901.5 TP2.1@1256.5,3901.5
NetC10_1: C10.1 U1.5 | length 131.7
  Top Layer w10: U1.5 1387.36,3117.64 1400,3105 1441.5,3105
NetC11_1: C11.1 R5.1 U1.8 | length 187.6
  Top Layer w10: U1.8 1481.03,3410.47 C11.1 R5.1@1516.5,3280
NetC12_1: C12.1 R5.2 | length 91.3
  Top Layer w10: R5.2@1583.5,3280 1658.5,3280 1670,3291.5
NetC14_1: C14.1 U2.1 | length 113.6
  Top Layer w20: U2.1 5180,3105 v1(5185,3110)
  Bottom Layer w20: C14.1 v1@5180,3105
NetC14_2: C14.2 L2.1 U2.3 | length 397
  Top Layer w20: v1(4975,3180) 5030,3180
  Top Layer w30: U2.3 5035,3175 5100,3240 L2.1
  Bottom Layer w20: v1@4976.5,3180 C14.2
NetC15_1: C15.1 C16.1 C17.1 L2.2 R9.1 R10.1 TP5.1 | length 935
  Top Layer w30: R10.1@4880,3143.5 4880,3615 4960.94,3695.94 L2.2 ; R9.1@5198.5,4205 5295,4301.5 TP5.1
NetC18_1: C18.1 C20.1 U2.6 | length 309.3
  Top Layer w30: C20.1 4980,2683.5 C18.1 5035,2821.5 U2.6
NetC18_2: C18.2 R11.2 | length 100
  Top Layer w30: C18.2 4871.5,2637 R11.2@4880,2628.5
NetC19_1: C19.1 U2.8 | length 112.9
  Top Layer w30: U2.8 C19.1@5247.91,2880.59
NetC22_1: C22.1 U3.1 | length 113.6
  Top Layer w20: U3.1 5765,3105 v1(5770,3110)
  Bottom Layer w20: C22.1 v1@5765,3105
NetC22_2: C22.2 L3.1 U3.3 | length 395
  Top Layer w20: v1(5560,3180) 5615,3180
  Top Layer w30: U3.3 5620,3175 5680,3235 L3.1
  Bottom Layer w20: v1@5561.5,3180 C22.2
NetC23_1: C23.1 C24.1 C25.1 L3.2 R14.1 R15.1 TP7.1 | length 939.2
  Top Layer w30: R15.1@5465,3143.5 5465,3625 5540,3700 5675.94,3700 L3.2 ; R14.1@5778.5,4205 5875,4301.5 TP7.1
NetC26_1: C26.1 C28.1 U3.6 | length 307.2
  Top Layer w30: C28.1 5570,2683.5 C26.1 5620,2816.5 U3.6
NetC26_2: C26.2 R16.1 | length 88
  Top Layer w30: R16.1@5461.5,2637 C26.2
NetC27_1: C27.1 U3.8 | length 120.9
  Top Layer w30: U3.8 5837.91,2880.59 C27.1
NetC30_1: C30.1 U4.1 | length 113.6
  Top Layer w20: U4.1 6300,3110 v1(6345,3110)
  Bottom Layer w20: C30.1 v1@6340,3105
NetC30_2: C30.2 L4.1 U4.3 | length 454.1
  Top Layer w20: 6190,3180 v1(6135,3180) 6185,3180 6195,3170
  Top Layer w30: U4.3 6195,3170 ; 6195,3175 6255,3235 L4.1
  Bottom Layer w20: v1@6136.5,3180 C30.2
NetC31_1: C31.1 C32.1 C33.1 L4.2 R19.1 R20.1 TP9.1 | length 925
  Top Layer w30: R20.1@6040,3143.5 6040,3615 6120.94,3695.94 L4.2 ; R19.1@6358.5,4205 6455,4301.5 TP9.1
NetC34_1: C34.1 C36.1 U4.6 | length 307.2
  Top Layer w30: C36.1 6145,2683.5 6103.5,2725 6195,2816.5 U4.6
NetC34_2: C34.2 R21.1 | length 88
  Top Layer w30: R21.1@6036.5,2637 C34.2@6036.5,2725
NetC35_1: C35.1 U4.8 | length 120.9
  Top Layer w30: U4.8 6412.91,2880.59 C35.1@6415,2878.5
NetC38_1: C38.1 U5.1 | length 113.6
  Top Layer w20: U5.1 6915,3105 v1(6920,3110)
  Bottom Layer w20: C38.1 v1@6915,3105
NetC38_2: C38.2 L5.1 U5.3 | length 395
  Top Layer w20: v1(6710,3180) 6765,3180
  Top Layer w30: U5.3 6770,3175 6830,3235 L5.1
  Bottom Layer w20: v1@6711.5,3180 C38.2
NetC39_1: C39.1 C40.1 C41.1 L5.2 R24.1 R25.1 TP11.1 | length 925
  Top Layer w30: R25.1@6615,3143.5 6615,3615 6695.94,3695.94 L5.2 ; R24.1@6933.5,4205 7030,4301.5 TP11.1
NetC42_1: C42.1 C44.1 U5.6 | length 307.2
  Top Layer w30: C44.1@6720,2628.5 6720,2683.5 6678.5,2725 6770,2816.5 U5.6
NetC42_2: C42.2 R26.1 | length 95
  Top Layer w20: R26.1@6615,2628.5 C42.2@6615,2723.5
NetC43_1: C43.1 U5.8 | length 117.9
  Top Layer w30: U5.8 C43.1@6987.91,2880.59
NetC46_1: C46.1 U6.1 | length 113.6
  Top Layer w20: U6.1 4035,3105 v1(4040,3110)
  Bottom Layer w20: C46.1 v1@4035,3105
NetC46_2: C46.2 L6.1 U6.3 | length 423.3
  Top Layer w20: v1(3830,3180) 3885,3180
  Top Layer w30: U6.3 3890,3180 3950,3240 L6.1 ; L6.1@4005,3289.06 L6.1@4025,3309.06
  Bottom Layer w20: v1@3831.5,3180 C46.2
NetC47_1: C47.1 C48.1 C49.1 L6.2 R29.1 R30.1 TP14.1 | length 936.1
  Top Layer w30: R30.1@3745,3142 3745,3640 3800.94,3695.94 L6.2 ; R29.1@4048.5,4205 4145,4301.5 TP14.1
NetC50_1: C50.1 C52.1 U6.6 | length 310.1
  Top Layer w30: C52.1 3845,2673.5 C50.1 3890,2801.5 U6.6
NetC50_2: C50.2 R31.2 | length 83
  Top Layer w30: R31.2@3736.5,2632 C50.2
NetC51_1: C51.1 U6.8 | length 110.9
  Top Layer w30: U6.8 4097.91,2880.59 C51.1
NetC54_1: C54.1 U7.1 | length 113.6
  Top Layer w20: U7.1 4570,3110 v1(4615,3110)
  Bottom Layer w20: C54.1 v1@4610,3105
NetC54_2: C54.2 L7.1 U7.3 | length 395
  Top Layer w20: v1(4405,3180) 4460,3180
  Top Layer w30: U7.3 4465,3180 4525,3240 L7.1
  Bottom Layer w20: v1@4406.5,3180 C54.2
NetC55_1: C55.1 C56.1 C57.1 L7.2 R34.1 R35.1 TP16.1 | length 927.1
  Top Layer w30: R35.1@4310,3143.5 4310,3610 4395.94,3695.94 L7.2 ; R34.1@4618.5,4205 4715,4301.5 TP16.1
NetC58_1: C58.1 C60.1 U7.6 | length 305.1
  Top Layer w30: C60.1 4420,2683.5 C58.1 4465,2811.5 U7.6
NetC58_2: C58.2 R36.2 | length 88
  Top Layer w30: R36.2@4311.5,2637 C58.2
NetC59_1: C59.1 U7.8 | length 112.9
  Top Layer w30: U7.8@4567.09,2878.5 C59.1
NetC62_1: C62.1 U8.1 | length 170.1
  Top Layer w30: U8.1 2390,3915 v1(2400,3925)
  Bottom Layer w30: C62.1 2373.5,3898.5 v1(2400,3925)
NetC62_2: C62.2 L8.1 U8.3 | length 563
  Top Layer w30: U8.3 v1(2290,3945) 2520,4175 L8.1
  Bottom Layer w30: v1(2290,3945) 2290,3861.5 C62.2
NetC63_1: C63.1 C64.1 C65.1 L8.2 R39.1 R40.1 TP19.1
NetC66_1: C66.1 C68.1 U8.6 | length 244.5
  Top Layer w30: C66.1 C68.1 2260,3530 2290,3560 U8.6
NetC66_2: C66.2 R41.2 | length 83
  Top Layer w30: R41.2@2160,3343.5 C66.2
NetC67_1: C67.1 U8.8 | length 76.7
  Top Layer w20: U8.8 2465.91,3625.59 C67.1
NetC70_1: C70.1 U9.1 | length 120.6
  Top Layer w20: U9.1 3325,3120 v1(3370,3120)
  Bottom Layer w20: C70.1 3365,3115 v1(3370,3120)
NetC70_2: C70.2 L9.1 U9.3 | length 433.4
  Top Layer w20: v1(3160,3190) 3215,3190 3220,3185
  Top Layer w30: U9.3 3220,3185 3220,3209.06 L9.1 ; L9.1@3360,3299.06 L9.1@3375,3314.06
  Bottom Layer w20: v1(3160,3190) 3161.5,3190 C70.2
NetC71_1: C71.1 C72.1 C73.1 L9.2 R44.1 R45.1 TP21.1 | length 1109.6
  Top Layer w30: R45.1@2965,2988.5 2965,3225 3325,3585 L9.2 ; L9.2@3347.44,3723.5 L9.2@3375,3695.94 ; R44.1@3418.5,4205 3525,4311.5 TP21.1
NetC74_1: C74.1 C76.1 U9.6 | length 203.7
  Top Layer w30: U9.6 3220,2791.5 C74.1 3245,2763.5 C76.1
NetC74_2: C74.2 R48.1 | length 92.1
  Top Layer w30: R48.1@3150,2698.5 3150,2788.5 C74.2
NetC75_1: C75.1 U9.8 | length 115.9
  Top Layer w30: U9.8@3325.59,2885 C75.1@3441.5,2885
NetD1_1: D1.1 L1.2 U1.1 U1.2
NetD2_1: D2.1 PTC1.2 | length 206.7
  Top Layer w40: D2.1 928.31,4292.95 PTC1.2
NetD7_1: D7.1 PTC2.2 | length 225.7
  Top Layer w30: D7.1 4910,4570 4940,4540 PTC2.2
NetD8_1: D8.1 PTC3.2 | length 225.7
  Top Layer w30: D8.1 5490,4560 5520,4530 PTC3.2
NetD9_1: D9.1 PTC4.2 | length 225.7
  Top Layer w30: D9.1 6070,4575 6100,4545 PTC4.2
NetD10_1: D10.1 PTC5.2 | length 225.7
  Top Layer w30: D10.1@6640,4631.26 6640,4575 6670,4545 PTC5.2
NetD11_1: D11.1 PTC6.2 | length 227.8
  Top Layer w30: D11.1 3760,4570 3795,4535 PTC6.2
NetD12_1: D12.1 PTC7.2 | length 225.7
  Top Layer w30: D12.1 4335,4565 4365,4535 PTC7.2
NetD13_1: D13.1 PTC8.2 | length 196.9
  Top Layer w80: D13.1 1590,3937.95 PTC8.2
NetD14_1: D14.1 PTC9.2 | length 183.3
  Top Layer w30: PTC9.2@3180,4442.95 D14.1
NetJ1_2: J1.2 U1.4 | length 259.2
  Top Layer w10: U1.4 1361.77,3068.23 1455,2975 J1.2@1460.59,2975
NetJ4_2: J4.2 R7.1 | length 106.8
  Bottom Layer w20: J4.2 1921.85,4833.5 R7.1
NetJ13_1: J13.1 R8.1 | length 132.2
  Top Layer w30: J13.1 5181.5,2578.5 R8.1@5255,2578.5
NetJ13_2: J13.2 U2.7 | length 184
  Top Layer w30: U2.7 5085,2840 5140,2785 J13.2@5140,2719.41
NetJ14_1: J14.1 R13.2 | length 132.2
  Top Layer w30: J14.1 5776.5,2578.5 R13.2@5850,2578.5
NetJ14_2: J14.2 U3.7 | length 188.1
  Top Layer w30: U3.7 5670,2850 5735,2785 J14.2@5735,2719.41
NetJ15_1: J15.1 R18.2 | length 132.2
  Top Layer w30: J15.1 6351.5,2578.5 R18.2@6425,2578.5
NetJ15_2: J15.2 U4.7 | length 218.7
  Top Layer w30: U4.7@6245,2860 U4.7@6245,2890.59 ; U4.7 6245,2850 6310,2785 J15.2@6310,2719.41
NetJ16_1: J16.1 R23.2 | length 132.2
  Top Layer w30: J16.1 6926.5,2578.5 R23.2@7000,2578.5
NetJ16_2: J16.2 U5.7 | length 218.7
  Top Layer w30: U5.7@6820,2860 U5.7@6820,2890.59 ; U5.7 6820,2850 6885,2785 J16.2@6885,2719.41
NetJ17_1: J17.1 R28.1 | length 137.8
  Top Layer w30: J17.1 4045,2580 R28.1@4105,2580
NetJ17_2: J17.2 U6.7 | length 181.9
  Top Layer w30: U6.7 3940,2820 3990,2770 J17.2@3990,2719.41
NetJ18_1: J18.1 R33.1 | length 128
  Top Layer w30: J18.1@4570,2610 4601.5,2578.5 R33.1@4685,2578.5
NetJ18_2: J18.2 U7.7 | length 184
  Top Layer w30: U7.7 4515,2840 4570,2785 J18.2@4570,2719.41
NetJ19_1: J19.1 R38.1 | length 135.9
  Top Layer w30: J19.1 2439.41,3255.59 2492.09,3255.59 R38.1@2496.5,3260
NetJ19_2: J19.2 U8.7 | length 234.2
  Top Layer w30: U8.7 2340,3570 2385,3525 J19.2
NetJ20_1: J20.1 R43.1 | length 132.2
  Top Layer w30: J20.1 3391.5,2593.5 R43.1@3465,2593.5
NetJ20_2: J20.2 U9.7 | length 191.4
  Top Layer w30: U9.7 3270,2840 3355,2755 J20.2@3355,2734.41
NetPTC1_1: PTC1.1 R1.2 TP3.1 | length 301.5
  Top Layer w40: R1.2@1095,3968.5 PTC1.1 TP3.1@1277.95,4087.05
NetPTC2_1: PTC2.1 R9.2 TP6.1 | length 362.9
  Top Layer w30: PTC2.1 4947.05,4205 5131.5,4205 TP6.1@5131.5,4373.5
NetPTC3_1: PTC3.1 R14.2 TP8.1 | length 353
  Top Layer w30: PTC3.1@5527.05,4205 5711.5,4205 TP8.1
NetPTC4_1: PTC4.1 R19.2 TP10.1 | length 348
  Top Layer w30: PTC4.1@6107.05,4205 6291.5,4205 TP10.1@6291.5,4368.5
NetPTC5_1: PTC5.1 R24.2 TP12.1 | length 348
  Top Layer w30: PTC5.1@6670,4205 R24.2@6854.45,4205 ; R24.2@6866.5,4205 TP12.1
NetPTC6_1: PTC6.1 R29.2 TP15.1 | length 360
  Top Layer w30: PTC6.1 3802.05,4205 3981.5,4205 3981.5,4373.5 TP15.1
NetPTC7_1: PTC7.1 R34.2 TP17.1 | length 350.1
  Top Layer w30: PTC7.1@4372.05,4205 R34.2@4551.5,4205 ; TP17.1 4556.5,4373.5 R34.2@4556.5,4205
NetPTC8_1: PTC8.1 R39.2 TP20.1
NetPTC9_1: PTC9.1 R44.2 TP22.1 | length 347.1
  Top Layer w30: PTC9.1 3187.05,4205 3351.5,4205 3351.5,4351.5 TP22.1@3370,4370
NetR2_2: R2.2 R3.1 | length 96.3
  Top Layer w10: R2.2@1175,3583.5 1186.5,3595 R3.1@1266.5,3595
NetR3_2: R3.2 R4.1 U1.9 | length 236.8
  Top Layer w10: R3.2@1333.5,3595 1370,3595 1411.5,3553.5 R4.1@1411.5,3505 ; U1.9 R4.1@1412.95,3503.55
NetR6_1: R6.1 U1.10 | length 116.8
  Top Layer w10: R6.1@1333.5,3505 1387.36,3451.14 U1.10
NetR10_2: R10.2 R12.1 U2.5 | length 261.1
  Top Layer w30: R10.2@4880,3076.5 4880,2948.5 4917.09,2948.5 U2.5
NetR15_2: R15.2 R17.1 U3.5 | length 261.1
  Top Layer w30: R15.2@5465,3076.5 5465,2948.5 5502.09,2948.5 U3.5
NetR20_2: R20.2 R22.1 U4.5 | length 261.1
  Top Layer w30: R20.2@6040,3076.5 6040,2948.5 6077.09,2948.5 U4.5
NetR25_2: R25.2 R27.1 U5.5 | length 261.1
  Top Layer w30: R25.2@6615,3076.5 6615,2948.5 6652.09,2948.5 U5.5
NetR30_2: R30.2 R32.1 U6.5 | length 260.1
  Top Layer w30: R32.1@3745,2948.5 R32.1@3745,2953.5 ; R30.2@3745,3075 R32.1@3745,2953.5 ; U6.5 3840,2895 3781.5,2953.5 R32.1@3745,2953.5
NetR35_2: R35.2 R37.1 U7.5 | length 269.6
  Top Layer w30: R35.2@4310,3076.5 4310,2948.5 4361.5,2948.5 4415,2895 U7.5
NetR40_2: R40.2 R42.1 U8.5 | length 199.9
  Top Layer w30: R40.2@2155,3771.5 2155,3678.5 2187.09,3678.5 U8.5
NetR45_2: R45.2 R46.1 R46.3 | length 434.1
  Top Layer w30: R46.1 2780,2715.98 R46.3 2965,2900.98 R45.2@2965,2921.5
NetR46_2: R46.2 R47.1 U9.5 | length 504.6
  Top Layer w30: R46.2 2980,2760 3075,2855 3075,2921.5 3105.91,2890.59 U9.5
V5_1: D7.2 J5.1 J5.3 J5.5
V5_2: D8.2 J6.1 J6.3 J6.5
V5_3: D9.2 J7.1 J7.3 J7.5
V5_4: D10.2 J8.1 J8.3 J8.5
V12_1: D11.2 J2.1 J2.3 J2.5
V12_2: D12.2 J3.1 J3.3 J3.5
VAR: D14.2 J10.1 J10.3 J10.5
VBASE: D5.2 D13.2 J4.1 J4.5
VBATT: C8.1 C9.1 D4.1 D5.1 J1.1 J12.1 J12.3 J12.5 L1.1 U1.3
VJACK: C61.1 D3.1 D6.1 J9.1 R38.2 U8.2 | length 397.2
  Top Layer w30: U8.2 2340,3935.71 2389.29,3985 2470,3985 2545,3910 C61.1@2545,3855
VJET: D2.2 D6.2 J11.1 J11.3 J11.5 | length 2876.7
  Top Layer w50: D2.2 900,4835 1025,4960 2715,4960 J11.1 2807.68,4867.32 J11.5 2807.68,4666.14 J11.3 2800,4630 2913.74,4516.26 D6.2
VPIN: C13.1 C21.1 C29.1 C37.1 C45.1 C53.1 C69.1 D3.2 D4.2 R8.2 R13.1 R18.1 R23.1 R28.2 R33.2 R43.2 U2.2 U3.2 U4.2 U5.2 U6.2 U7.2 U9.2 | length 2166.6
  Top Layer w30: U9.2 3270,3175 3290,3195 3402,3195 C69.1 ; U6.2 3940,3170 3980,3210 4090,3210 4115,3185 C45.1 ; U7.2 4515,3165 4560,3210 4665,3210 4690,3185 C53.1 ; U2.2 5085,3155 5140,3210 5235,3210 5260,3185 C13.1 ; U3.2 5670,3160 5720,3210 5815,3210 5855,3170 5855,3142 C21.1@5845,3132 ; U4.2 6245,3160 6295,3210 6390,3210 6430,3170 6430,3142 C29.1@6420,3132 ; U5.2 6820,3160 6870,3210 6965,3210 7005,3170 7005,3142 C37.1@6995,3132
pads on no net: FID1.0 FID2.0 FID3.0 J4.3

## Polygon pours and split planes (outlines as drawn)
VPIN on Top Layer "VPIN" (solid, remove dead copper, pour order 60): 6965,2425 6965,2530.9 6965,2535.9 6970,2540.9 7050,2540.9 7055,2545.9 7055,3100.9 7050,3105.9 7045,3110.9 6970,3110.9 6965,3115.9 6965,3155.9 6965,3160.9 6970,3165.9 6975,3170.9 7145,3170.9 7145,2425
NetC39_1 on Top Layer "NetC31_1" (solid, pour order 58): 6720,3635 6730,3625 6965,3625 6965,3860 6965,3970 6965,4225 6955,4235 6910,4235 6905,4230 6905,4105 6900,4105 6900,4005 6895,4000 6740,4000 6720,3980
V5_4 on Top Layer "V5_4" (solid, pour order 56): 6595,4740 6605,4730 6800,4730 6805,4725 6805,4630 6820,4615 6885,4615 6895,4625 6900,4630 6900,4735 6900,4910 6890,4920 6885,4925 6805,4925 6800,4920 6800,4850 6795,4845 6600,4845 6595,4840
VPIN on Top Layer "VPIN" (solid, remove dead copper, pour order 54): 6390,2425 6390,2530.9 6390,2535.9 6395,2540.9 6475,2540.9 6480,2545.9 6480,3100.9 6475,3105.9 6470,3110.9 6395,3110.9 6390,3115.9 6390,3155.9 6390,3160.9 6395,3165.9 6400,3170.9 6570,3170.9 6570,2425
NetC31_1 on Top Layer "NetC31_1" (solid, pour order 52): 6145,3635 6155,3625 6390,3625 6390,3860 6390,3970 6390,4225 6380,4235 6335,4235 6330,4230 6330,4105 6325,4105 6325,4005 6320,4000 6165,4000 6145,3980
V5_3 on Top Layer "V5_3" (solid, pour order 50): 6025,4740 6035,4730 6230,4730 6235,4725 6235,4630 6250,4615 6315,4615 6325,4625 6330,4630 6330,4735 6330,4910 6320,4920 6315,4925 6235,4925 6230,4920 6230,4850 6225,4845 6030,4845 6025,4840
VPIN on Top Layer "VPIN" (solid, remove dead copper, pour order 48): 5815,2425 5815,2530.9 5815,2535.9 5820,2540.9 5900,2540.9 5905,2545.9 5905,3100.9 5900,3105.9 5895,3110.9 5820,3110.9 5815,3115.9 5815,3155.9 5815,3160.9 5820,3165.9 5825,3170.9 5995,3170.9 5995,2425
NetC23_1 on Top Layer "NetC23_1" (solid, pour order 46): 5565,3635 5575,3625 5810,3625 5810,3860 5810,3970 5810,4225 5800,4235 5755,4235 5750,4230 5750,4105 5745,4105 5745,4005 5740,4000 5585,4000 5565,3980
V5_2 on Top Layer "V5_2" (solid, pour order 44): 5445,4740 5455,4730 5650,4730 5655,4725 5655,4630 5670,4615 5735,4615 5745,4625 5750,4630 5750,4735 5750,4910 5740,4920 5735,4925 5655,4925 5650,4920 5650,4850 5645,4845 5450,4845 5445,4840
V12_1 on Top Layer "V12_1" (solid, remove dead copper, pour order 26): 3710,4740 3720,4730 3915,4730 3920,4725 3920,4630 3935,4615 4000,4615 4010,4625 4015,4630 4015,4735 4015,4910 4005,4920 4000,4925 3920,4925 3915,4920 3915,4850 3910,4845 3715,4845 3710,4840
VAR on Top Layer "VAR" (solid, remove dead copper, pour order 22): 3130,4735 3140,4725 3335,4725 3340,4720 3340,4625 3350,4615 3425,4615 3430,4620 3435,4625 3435,4730 3435,4905 3425,4915 3420,4920 3340,4920 3335,4915 3335,4845 3330,4840 3135,4840 3130,4835
VPIN on Top Layer "VPIN" (solid, remove dead copper, pour order 20): 2145,2940 2135,2930 2135,2760 2135,2300 2800,2300 7145,2300 7145,2425 3585,2425 3585,3170 3415,3170 3415,3115 3515,3115 3515,2995 3515,2560 3510,2555 3445,2555 3435,2545 3435,2425 2725,2425 2725,2960 2165,2960
NetC71_1 on Top Layer "NetC71_1" (solid, pour order 16): 3205,3645 3220,3630 3455,3630 3455,3865 3455,3975 3455,4230 3445,4240 3400,4240 3395,4235 3395,4110 3390,4110 3390,4010 3385,4005 3230,4005 3205,3980
NetPTC8_1 on Top Layer "NetC63_1" (solid, remove dead copper, pour order 14): 1755,3855 1750,3850 1750,3735 1745,3730 1560,3730 1555,3725 1555,3645 1560,3640 1820,3640 1825,3635 1825,3610 1830,3605 1880,3605 1885,3610 1885,3670 1880,3675 1880,3715 1885,3720 1885,3850 1880,3855
NetC63_1 on Top Layer "NetC63_1" (solid, pour order 12): 1895,3615 1905,3605 1945,3605 1955,3615 1955,3710 1960,3715 2025,3715 2030,3715 2035,3720 2035,3800 2040,3805 2115,3805 2120,3810 2185,3810 2190,3815 2190,4055 2195,4060 2235,4060 2240,4065 2240,4285 2235,4290 2110,4290 2105,4285 2095,4275 2050,4275 1915,4275 1910,4270 1910,4080 1905,4075 1895,4075 1890,4070 1890,3870 1900,3860 1900,3675 1900,3670 1895,3665 1895,3615
NetC1_1 on Top Layer "NetC1_1" (solid, pour order 10): 1030,2980 1140,2980 1145,2985 1145,3245 1150,3250 1205,3250 1210,3255 1210,3540 1205,3545 1135,3545 1130,3550 1130,3655 1135,3660 1165,3660 1170,3665 1170,3850 1170,3855 1165,3860 1140,3860 1135,3865 1130,3870 1130,3925 1125,3930 1065,3930 1060,3925 1060,3865 1055,3860 1030,3860 1025,3860 1020,3855 1020,3455 1030,3445 1060,3445 1060,3075 1055,3070 1030,3070
NetD1_1 on Top Layer "NetD1_1" (solid, pour order 8): 1270,3225 1320,3225 1320,2525 1315,2520 1195,2520 1190,2520 1185,2525 1185,3070 1270,3155 1270,3225
VBASE on Top Layer "VBASE" (solid, pour order 6): 1675,4920 1760,4920 1765,4915 1770,4910 1770,4575 1770,4480 1705,4415 1640,4350 1640,4175 1635,4170 1545,4170 1540,4175 1540,4295 1470,4365 1470,4450 1475,4455 1580,4455 1610,4485 1610,4855
VBATT on Top Layer "VBATT" (solid, pour order 4): 1075,4925 1075,4435 1145,4365 1225,4365 1235,4365 1315,4285 1380,4220 1380,3880 1380,3625 1440,3565 1445,3560 1525,3560 1645,3440 1730,3440 1730,3235 1615,3120 1590,3095 1590,2905 1345,2905 1345,3225 1330,3225 1330,2905 1330,2865 1570,2865 1570,2750 1570,2505 1710,2505 1715,2510 1715,2745 2100,2745 2120,2765 2120,2935 1945,2935 1910,2970 1910,3435 1740,3605 1720,3625 1540,3625 1495,3670 1495,4310 1435,4370 1430,4375 1430,4465 1400,4495 1220,4495 1215,4495 1185,4525 1185,4925
VJACK on Top Layer "VJACK" (solid, pour order 2): 2275,4550 2275,4390 2590,4390 2640,4340 2640,3925 2640,3920 2615,3895 2495,3895 2495,3815 2505,3805 2510,3800 2635,3800 2635,3385 2535,3285 2535,3060 2460,3060 2435,3035 2435,2980 2440,2975 2600,2975 2820,2975 2825,2980 2825,4440 2780,4485 2460,4485 2395,4550
NetC47_1 on Top Layer "NetC47_1" (solid, pour order 28): 3835,3640 3845,3630 4080,3630 4080,3865 4080,3975 4080,4230 4070,4240 4025,4240 4020,4235 4020,4110 4015,4110 4015,4010 4010,4005 3855,4005 3835,3985
NetC55_1 on Top Layer "NetC55_1" (solid, pour order 30): 4410,3640 4420,3630 4655,3630 4655,3865 4655,3975 4655,4230 4645,4240 4600,4240 4595,4235 4595,4110 4590,4110 4590,4010 4585,4005 4430,4005 4410,3985
V12_2 on Top Layer "V12_2" (solid, remove dead copper, pour order 32): 4285,4740 4295,4730 4490,4730 4495,4725 4495,4630 4510,4615 4575,4615 4585,4625 4590,4630 4590,4735 4590,4910 4580,4920 4575,4925 4495,4925 4490,4920 4490,4850 4485,4845 4290,4845 4285,4840
VPIN on Top Layer "VPIN" (solid, remove dead copper, pour order 34): 4070,2425 4070,2530 4070,2535 4075,2540 4155,2540 4160,2545 4160,3100 4155,3105 4150,3110 4075,3110 4070,3115 4070,3155 4070,3160 4075,3165 4080,3170 4250,3170 4250,2425
VPIN on Top Layer "VPIN" (solid, remove dead copper, pour order 36): 4650,2380 4650,2530.9 4650,2535.9 4655,2540.9 4735,2540.9 4740,2545.9 4740,3100.9 4735,3105.9 4730,3110.9 4655,3110.9 4650,3115.9 4650,3155.9 4650,3160.9 4655,3165.9 4660,3170.9 4830,3170.9 4830,2380
V5_1 on Top Layer "V5_1" (solid, pour order 38): 4865,4740 4875,4730 5070,4730 5075,4725 5075,4630 5090,4615 5155,4615 5165,4625 5170,4630 5170,4735 5170,4910 5160,4920 5155,4925 5075,4925 5070,4920 5070,4850 5065,4845 4870,4845 4865,4840
NetC15_1 on Top Layer "NetC15_1" (solid, pour order 40): 4985,3635 4995,3625 5230,3625 5230,3860 5230,3970 5230,4225 5220,4235 5175,4235 5170,4230 5170,4105 5165,4105 5165,4005 5160,4000 5005,4000 4985,3980
VPIN on Top Layer "VPIN" (solid, remove dead copper, pour order 42): 5220,2425 5220,2530.9 5220,2535.9 5225,2540.9 5305,2540.9 5310,2545.9 5310,3100.9 5305,3105.9 5300,3110.9 5225,3110.9 5220,3115.9 5220,3155.9 5220,3160.9 5225,3165.9 5230,3170.9 5400,3170.9 5400,2425
GND on Bottom Layer "GND" (solid, pour order 62): 335,5105 335,2225 7605,2225 7605,5105 335,5105

## Silkscreen, mask and mechanical layers (free items; w line width, h text height)
Top Overlay:
  text "VBATT IN" at 1125,5055 h25
  text "Robot Base (15V)" at 1615,5050 h25
  text "19V IN" at 2275,5050 h25
  text "19V 1.48 A" at 2765,5050 h25
  text "2.5-13V 2 A" at 3350,5050 h25
  text "12V 2 A" at 3960,5050 h25
  text "12V 2 A" at 4535,5050 h25
  text "5V 2 A" at 5140,5050 h25
  text "5V 2 A" at 5720,5050 h25
  text "5V 2 A" at 6300,5050 h25
  text "5V 2 A" at 6865,5050 h25
  text "+" at 2780,4980 h60
  text "-" at 2945,4980 h60
  text "+" at 3365,4980 h60
  text "-" at 3530,4980 h60
  text "+" at 3945,4980 h60
  text "-" at 4110,4980 h60
  text "+" at 4520,4980 h60
  text "-" at 4685,4980 h60
  text "+" at 5100,4980 h60
  text "-" at 5265,4980 h60
  text "+" at 5680,4980 h60
  text "-" at 5845,4980 h60
  text "+" at 6260,4980 h60
  text "-" at 6425,4980 h60
  text "+" at 6825,4980 h60
  text "-" at 6990,4980 h60
  text "GND" at 2870,4050 h60
Mechanical 1:
  the board outline again, w4